# Altium PCB Mainboard.PcbDoc (part 2 of 2)
Units mm, origin at the board's own origin, x right, y up, seen from the top; angles counter-clockwise.
Board outline 80 x 116 mm, 4 copper layers (Top Layer, GND, VCC, Bottom Layer), stack 1.042 mm thick; 135 components, 105 nets, 477 pads, 1100 vias.
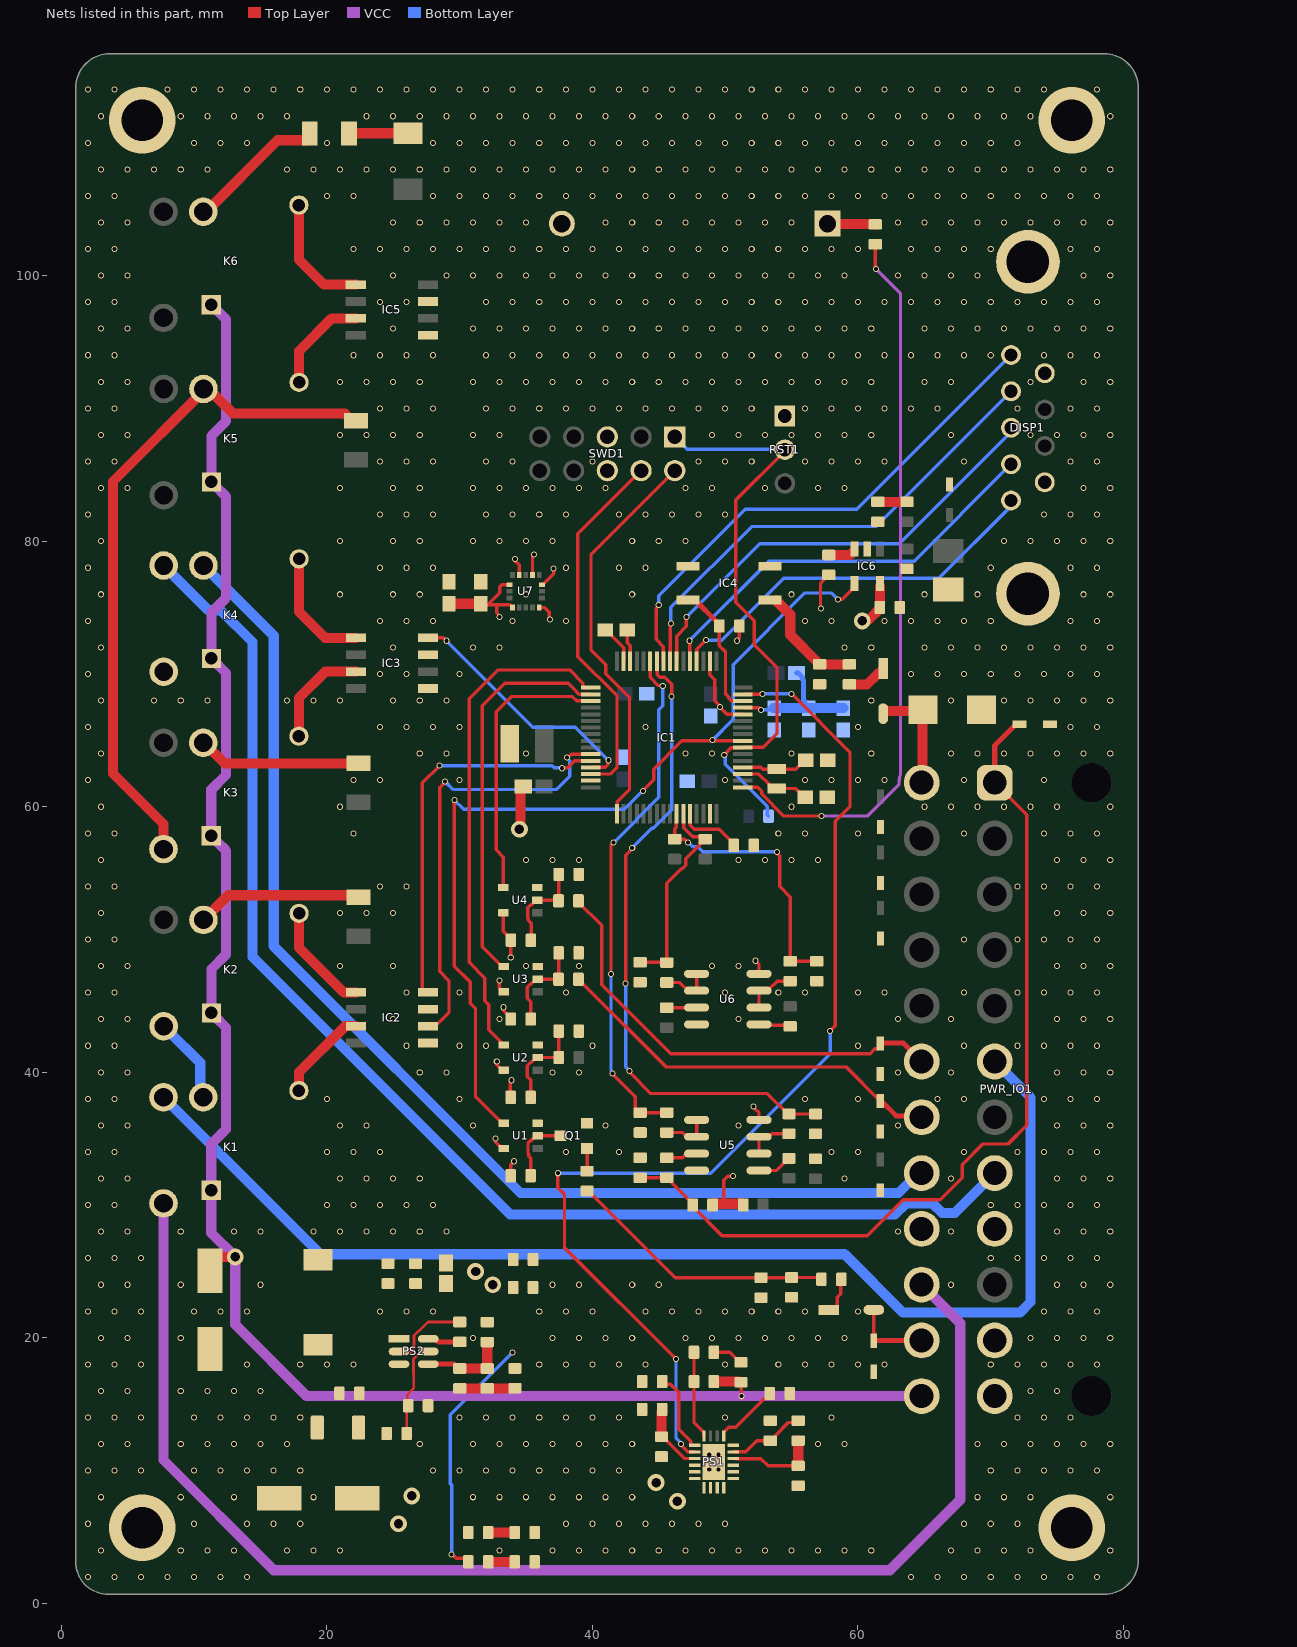
[diagram p4: the nets of this part, all layers, seen from the top]

## Via types
v1: diameter 0.457/0.457/0.457/0.457 (per signal layer), hole 0.305, Top Layer to Bottom Layer, tented both sides, 996 vias
v2: diameter 0.457, hole 0.305, Top Layer to Bottom Layer, tented both sides, 84 vias
v3: diameter 1.27, hole 0.711, Top Layer to Bottom Layer, tented both sides, 16 vias
v4: diameter 5, hole 3.1, Top Layer to Bottom Layer, 4 vias

## Nets (pads, with @x,y where several pads share a name; then routed paths per layer and width w, separated by ;. In a path a pad name is that pad's centre, name@x,y a point inside that pad or via, vN(x,y) a via of type N, cw(c..) or ccw(c..) an arc to the next point about the centre after c; other vN are vias at no path point) (continued)
LIGHT_SEL_IN_AUTOMODE: IC1.44 IC2.4 | length 29.1
  Top Layer w0.254: IC2.4@27.613,46.017 27.398,46.017 27.2,46.215 27.2,61.8 v2(28.5,63.1) ; v2(37.7,62.9) 37.739,62.939 38.129,62.939 38.652,63.462 39.339,63.462 IC1.44@39.349,63.452
  Bottom Layer w0.254: v2(28.5,63.1) 36.963,63.1 37.125,62.939 37.661,62.939 v2(37.7,62.9)
LIGHT_SWITCH: K1.3 PWR_IO1.6 | length 91.4
  Bottom Layer w0.762: K1.3@7.7,37.8 8.025,37.8 19.525,26.3 59,26.3 63.4,21.9 72.2,21.9 73,22.7 73,38.113 PWR_IO1.6@70.3,40.812
LIGHTS_MODE: IC1.43 IC2.2 | length 33.2
  Top Layer w0.254: IC2.2@27.613,43.477 27.811,43.675 IC2.2@28.375,43.675 ; 28.4,43.7 29.2,44.5 29.2,46.9 28.5,47.6 28.5,61.445 28.9,61.845 v2(28.9,61.9) ; v2(38.1,63.7) 38.155,63.7 38.417,63.962 IC1.43@39.862,63.962
  Bottom Layer w0.254: v2(28.9,61.9) 29.5,61.3 37.3,61.3 38.3,62.3 38.3,63.45 38.1,63.65 v2(38.1,63.7)
MENU_BUTTON: D7.1 PWR_IO1.18 R17.2 | length 34.4
  Top Layer w0.254: R17.2@38.95,52.912 38.95,52.812 40.7,51.062 40.7,46.6 45.9,41.4 60.913,41.4 61.277,41.764 61.527,41.764 61.675,41.912 D7.1@61.675,42.162
  Top Layer w0.381: D7.1@61.6,42.2 63.413,42.2 PWR_IO1.18@64.8,40.812
NetC1_1: C1.1 L1.1 PS2.2 | length 6.1
  Top Layer w0.2: PS2.2@25.438,18.974 26.374,18.974 26.561,19.161 26.561,20.167 26.905,20.51 26.934,20.51 27.62,21.196 C1.1@30.016,21.196
NetC1_2: C1.2 PS2.6 | length 2.5
  Top Layer w0.381: PS2.6@27.639,19.924 28.182,19.924 28.41,19.696 C1.2@30.016,19.696
NetC9_1: C9.1 PS2.4 R4.1 R5.1 | length 6.5
  Top Layer w0.381: PS2.4@27.639,18.024 29.585,18.024 29.913,17.696 C9.1@30.013,17.696
  Top Layer w0.762: C9.1@30.013,17.696 R4.1@31.968,17.696 ; R4.1@32.084,17.696 R5.1@32.084,19.683
NetC9_2: C9.2 R2.1 R4.2 | length 4.2
  Top Layer w0.762: C9.2@30.013,16.196 R2.1@34.17,16.196
NetC17_1: C17.1 IC1.27 R33.1 | length 39.1
  Top Layer w0.254: v2(41.4,47.4) 41.4,57.1 v2(41.6,57.3) ; v2(41.5,39.9) 43.227,38.173 43.227,37.236 43.5,36.963 C17.1@43.6,36.963 ; C17.1@43.662,36.962 R33.1@45.601,36.962 ; IC1.27@44.35,70.95 44.35,69.75 44.973,69.127 45.273,69.127 v2(45.3,69.1)
  Bottom Layer w0.254: v2(41.4,47.4) 41.4,40.144 41.461,40.082 41.461,39.939 v2(41.5,39.9) ; v2(41.6,57.3) 45,60.7 45,67.3 45.3,67.6 v2(45.3,69.1)
NetC18_1: C18.1 IC1.59 R34.1 R37.2 | length 15
  Top Layer w0.254: C18.1@43.7,48.3 43.724,48.276 45.587,48.276 R34.1@45.601,48.262 45.601,54.226 46.71,55.335 46.777,55.335 47.027,55.585 47.027,56.089 48.127,57.189 48.127,57.289 48.4,57.562 R37.2@48.5,57.562 ; IC1.59@46.855,58.99 46.873,58.971 46.873,58.427 47.562,57.738 48.324,57.738 R37.2@48.462,57.6
NetC20_1: C20.1 IC1.26 R35.1 | length 48.4
  Top Layer w0.254: v2(42.5,46.7) 42.5,56.345 43,56.845 v2(43,56.9) ; v2@42.8,40 44.4,38.4 53.163,38.4 54.701,36.862 R35.1@54.801,36.862 56.638,36.862 C20.1@56.7,36.8 ; IC1.26@44.85,70.95 44.873,70.927 44.873,69.927 45.062,69.738 45.452,69.738 45.965,69.225 v2(45.963,68.3) v2(45.963,68.3)
  Bottom Layer w0.254: v2(42.5,46.7) 42.5,40.4 v2(42.8,40.1) ; v2(43,56.9) 44.471,58.371 44.571,58.371 45.963,59.763 v2(45.963,68.3)
NetC21_1: C21.1 C22.1 C23.1 FB3.2 IC1.13 | length 10.2
  Top Layer w0.254: IC1.13@51.338,67.462 52.538,67.462 v2@52.6,67.4
  Bottom Layer w0.254: v2(52.7,67.3) C23.1@53.5,67.3
  Bottom Layer w0.381: FB3.2@55.376,70.073 55.5,70.073 55.839,69.734 55.839,69.573 55.9,69.511 55.9,68.042 55.985,67.957 55.985,67.818 56.2,67.603 C22.1@56.2,67.6
  Bottom Layer w0.762: C23.1@53.63,67.43 56.2,67.43 C21.1@58.9,67.43
NetC29_1: C29.1 IC1.58 R36.1 R38.2 | length 20
  Top Layer w0.254: IC1.58@46.356,58.95 46.327,58.921 46.327,58.47 46.2,58.343 R38.2@46.2,57.562 46.938,57.562 v2(47.2,57.3) ; v2(53.9,56.6) 53.939,56.561 53.939,56.461 54.1,56.3 54.1,54 54.901,53.199 R36.1@54.901,48.362 ; R36.1@54.901,48.362 56.662,48.362 C29.1@56.7,48.4
  Bottom Layer w0.254: v2(47.2,57.3) 47.255,57.3 47.576,56.979 47.921,56.979 48.3,56.6 v2(53.9,56.6)
NetC30_1: C30.1 R8.2 R10.1 U2.2 | length 7
  Top Layer w0.254: R8.2@35.35,38.112 35.35,39.428 35.1,39.678 35.1,40.495 35.369,40.764 35.403,40.764 35.739,41.1 U2.2@35.8,41.1 ; U2.2@35.876,41.112 37.388,41.112 R10.1@37.4,41.1 ; R10.1@37.466,41.112 37.472,41.118 37.472,43.072 C30.1@37.5,43.1
NetC31_1: C31.1 R7.1 R9.2 R11.1 | length 20.5
  Top Layer w0.254: R9.2@39.6,31.2 39.6,31.163 46.228,24.535 C31.1@52.7,24.535 ; C31.1@52.759,24.541 54.995,24.541 R11.1@55,24.547 ; R11.1@54.953,24.547 57.115,24.547 R7.1@57.25,24.412
NetC32_1: C32.1 R12.2 R13.1 U3.2 | length 7
  Top Layer w0.254: R12.2@35.35,44.012 35.35,45.328 35.1,45.578 35.1,46.395 35.369,46.664 35.403,46.664 35.739,47 U3.2@35.876,47 ; U3.2@35.876,47.012 37.388,47.012 R13.1@37.4,47 ; R13.1@37.45,47.012 37.456,47.018 37.456,48.856 C32.1@37.5,48.9
NetC33_1: C33.1 IC4.1 R15.1 | length 8.4
  Top Layer w0.762: IC4.1@53.845,75.516 54.9,74.461 54.9,72.95 56.996,70.854 56.996,70.754 57.015,70.735 C33.1@57.115,70.735 ; C33.1@57.177,70.723 R15.1@59.351,70.723
NetC34_1: C34.1 R16.2 R17.1 U4.2 | length 7.4
  Top Layer w0.254: R16.2@35.366,49.943 35.4,49.977 35.4,51.23 35.171,51.46 35.171,51.583 35.123,51.631 35.123,52.394 35.344,52.614 35.429,52.614 35.577,52.763 35.577,52.814 35.663,52.9 U4.2@35.9,52.9 ; U4.2@35.85,52.962 37.362,52.962 R17.1@37.4,53 ; C34.1@37.3,55.1 37.456,54.944 37.456,52.918 R17.1@37.45,52.912
NetC37_2: C37.2 IC1.30 | length 1.9
  Top Layer w0.254: C37.2@42.627,73.312 42.627,72.347 42.85,72.124 42.85,71.546 IC1.30@42.869,71.527
NetD1_1: D1.1 R7.2 | length 2.8
  Top Layer w0.254: D1.1@57.8,22.113 58.207,22.113 58.452,22.357 58.452,23.074 58.7,23.322 R7.2@58.7,24.3
NetD2_2: D2.2 F2.1 | length 4.5
  Top Layer w0.762: F2.1@21.6,110.7 21.617,110.717 26.096,110.717 D2.2@26.101,110.722
NetD6_1: D6.1 R15.2 | length 3.3
  Top Layer w0.762: R15.2@59.3,69.2 60.688,69.2 61.503,70.015 61.891,70.015 61.9,70.024 D6.1@61.9,70.412
NetD9_A: D9.A R18.1 | length 2.4
  Top Layer w0.254: D9.A@49.15,18.912 50.351,18.912 51.1,18.163 R18.1@51.2,18.163
NetD9_K: D9.K PS1.20 R22.1 | length 6.6
  Top Layer w0.254: D9.K@47.65,18.912 R22.1@47.65,16.713 47.65,13.658 48.4,12.908 PS1.20@48.4,12.612
NetD15_A: D15.A R42.1 | length 1.9
  Top Layer w0.762: R42.1@32.15,3.135 33.965,3.135 D15.A@34,3.1
NetD16_A: D16.A R45.1 | length 2
  Top Layer w0.762: R45.1@32.15,5.335 34.035,5.335 D16.A@34.1,5.4
NetD17_A: D17.A R43.1 | length 2.3
  Top Layer w0.762: D17.A@61.5,82.962 63.762,82.962 R43.1@63.8,83
NetF1_2: F1.2 K2.5 | length 12.3
  Top Layer w0.762: K2.5@11,51.6 11,51.763 12.571,53.334 22.248,53.334 F1.2@22.4,53.182
NetF2_2: F2.2 K6.5 | length 10.7
  Top Layer w0.762: K6.5@10.7,104.812 10.912,104.812 16.293,110.193 18.526,110.193 18.73,110.397 F2.2@18.73,110.712
NetF3_1: F3.1 K3.4 K5.5 | length 51.6
  Top Layer w0.762: K3.4@7.7,56.812 7.7,58.7 3.9,62.5 3.9,84.5 K5.5@11,91.6 ; K5.5@10.8,91.3 11.248,91.3 12.947,89.601 21.366,89.601 21.885,89.082 F3.1@22.2,89.082
NetF4_1: F4.1 K3.5 | length 12.3
  Top Layer w0.762: K3.5@10.9,64.9 10.9,64.661 12.293,63.268 F4.1@22.4,63.268
NetIC1_1: IC1.1 R39.2 | length 55.1
  Top Layer w0.254: IC1.1@51.338,61.462 52.438,61.462 52.745,61.155 52.745,60.98 54.425,59.3 v2(57.255,59.3) ; v2@61.301,100.601 R39.2@61.301,102.362
  VCC w0.254: v2(57.255,59.3) 60.7,59.3 63.02,61.62 63.095,61.695 63.095,61.812 cw(c64.8,61.812) 63.16,62.278 63.2,62.42 63.2,98.656 63.126,98.73 v2(61.344,100.511)
NetIC1_8: IC1.8 IC6.4 U1.4 | length 68.7
  Top Layer w0.254: v2(29.6,60.5) 29.6,48 30.8,46.8 30.8,45.2 31.2,44.8 31.2,38.162 33.2,36.162 U1.4@33.325,36.162 ; v2(43.8,61.2) 44.615,62.015 44.615,62.831 46.747,64.962 49.046,64.962 50.994,64.962 IC1.8@51.011,64.979 ; v2(58.5,75.6) 58.521,75.621 58.833,75.621 59.577,76.365 59.577,76.677 IC6.4@59.6,76.7
  Bottom Layer w0.254: v2(29.6,60.5) 30.3,59.8 42.4,59.8 v2(43.8,61.2) ; v2(49.046,65.022) 50.6,66.576 50.6,70.7 56,76.1 58,76.1 v2(58.5,75.6)
NetIC1_14: IC1.14 IC4.4 R14.2 | length 10.1
  Top Layer w0.254: R14.2@49.566,73.612 49.566,73.6 49.566,72.134 50.025,71.675 50.025,68.492 50.274,68.244 50.274,68.177 50.465,67.985 51.315,67.985 IC1.14@51.338,67.962
  Top Layer w0.381: IC4.4@47.187,75.572 47.725,75.572 49.356,73.941 49.356,73.744 R14.2@49.5,73.6
NetIC1_15: IC1.15 PS1.2 | length 82.6
  Top Layer w0.254: v2(37.4,32.4) 37.4,31.3 37.9,30.8 37.9,26.8 v2(46.3,18.4) ; v2@46.7,11.9 47.186,11.414 47.698,11.414 PS1.2@47.7,11.412 ; IC1.15@51.338,68.462 52.562,68.462 v2@52.6,68.5 ; v2(55,68.5) 59.4,64.1 59.4,60 58.3,58.9 58.3,43.5 v2@58,43.2
  Bottom Layer w0.254: v2(37.4,32.4) 48.9,32.4 57.9,41.4 v2(57.9,43.1) ; v2(46.3,18.4) 46.3,12.439 46.69,12.05 v2(46.69,11.995) ; v2(52.8,68.5) v2(55,68.5)
NetIC1_33: IC1.33 U2.4 | length 37.9
  Top Layer w0.254: U2.4@33.326,42.062 32.2,43.188 32.2,45.1 31.9,45.4 31.9,47.1 30.717,48.283 30.717,68.117 32.9,70.3 38.3,70.3 39.291,69.309 39.291,68.985 39.314,68.962 IC1.33@39.862,68.962
NetIC1_34: IC1.34 U3.4 | length 29.6
  Top Layer w0.254: U3.4@33.326,47.962 33.201,47.962 31.7,49.463 31.7,67.6 33.4,69.3 38.2,69.3 38.798,68.702 38.798,68.677 38.989,68.485 39.839,68.485 IC1.34@39.862,68.462
NetIC1_35: IC1.35 U4.4 | length 21.2
  Top Layer w0.254: 33.3,54.9 33.3,56.2 32.749,56.751 32.749,67.149 33.9,68.3 38.5,68.3 38.815,67.985 39.839,67.985 IC1.35@39.862,67.962 ; U4.4@33.3,53.912 33.3,54.9
NetIC1_60: IC1.60 R40.2 | length 4.9
  Top Layer w0.254: IC1.60@47.35,59.474 47.373,59.451 47.373,58.601 47.675,58.3 49.542,58.3 50.6,57.242 R40.2@50.6,57
NetIC2_5: IC2.5 K2.2 | length 8.2
  Top Layer w0.762: K2.2@18,51.9 17.911,51.811 17.911,49.389 21.283,46.017 IC2.5@22.189,46.017
NetIC2_7: IC2.7 K1.2 | length 7.1
  Top Layer w0.762: K1.2@17.9,38.6 17.9,40 21.377,43.477 IC2.7@22.189,43.477
NetIC3_5: IC3.5 K4.2 | length 9.1
  Top Layer w0.762: K4.2@17.9,78.7 17.91,78.69 17.91,74.69 19.6,73 19.883,72.717 IC3.5@22.189,72.717
NetIC3_7: IC3.7 K3.2 | length 7.9
  Top Layer w0.762: K3.2@17.9,65.4 17.9,68.2 19.877,70.177 IC3.7@22.189,70.177
NetIC5_5: IC5.5 K6.2 | length 9.1
  Top Layer w0.762: K6.2@17.9,105.2 17.9,101.2 19.5,99.6 19.783,99.317 IC5.5@22.188,99.317
NetIC5_7: IC5.7 K5.2 | length 7.7
  Top Layer w0.762: K5.2@18,91.9 17.91,91.99 17.91,94.31 20.377,96.777 IC5.7@22.188,96.777
NetIC6_3: IC6.3 R27.1 | length 2
  Top Layer w0.762: R27.1@57.801,78.962 59.413,78.962 IC6.3@59.669,79.219
NetK1_5: K1.5 K2.4 | length 6.3
  Bottom Layer w0.762: K2.4@7.8,43.1 8.084,43.1 10.467,40.718 10.467,38.358 K1.5@10.7,38.124
NetPS1_1: PS1.1 R25.2 | length 6.2
  Top Layer w0.254: R25.2@45.25,16.713 45.445,16.518 45.882,16.518 46.501,15.899 46.501,13.112 47.409,12.204 47.409,11.914 47.411,11.912 PS1.1@47.7,11.912
NetPS1_3: PS1.3 R23.1 R24.2 | length 5.2
  Top Layer w0.254: R23.1@45.301,12.562 46.949,10.914 47.698,10.914 PS1.3@47.7,10.912
  Top Layer w0.762: R23.1@45.201,12.562 45.201,14.463 45.25,14.513 R24.2@45.25,14.613
NetPS1_14: PS1.14 R19.1 R20.2 | length 6.8
  Top Layer w0.254: PS1.14@50.8,10.9 52.695,10.9 53.232,10.363 R19.1@55.5,10.363
  Top Layer w0.762: R19.1@55.501,10.363 R20.2@55.501,12.262
NetPS1_15: PS1.15 R20.1 R21.2 | length 5.9
  Top Layer w0.254: PS1.15@50.6,11.412 51.537,11.412 52.387,12.263 53.5,12.263 53.773,12.536 53.773,12.636 54.769,13.631 55.369,13.631 R20.1@55.501,13.762
NetPS1_17: PS1.17 R44.1 | length 4.7
  Top Layer w0.254: PS1.17@49.902,12.91 50.265,13.272 50.81,13.272 52.977,15.44 53.077,15.44 53.35,15.713 R44.1@53.35,15.813
NetPS2_5: PS2.5 R1.1 R3.2 | length 7.2
  Top Layer w0.2: R1.1@26.009,12.796 26.009,14.783 R3.2@26.122,14.896 26.066,14.952 26.066,15.722 26.544,16.2 26.544,17.253 26.526,17.27 26.526,18.409 27.091,18.974 PS2.5@27.639,18.974
NetQ1_1: Q1.1 R9.1 | length 1.7
  Top Layer w0.254: R9.1@39.6,32.6 Q1.1@39.601,34.262
NetQ1_3: Q1.3 R6.2 U1.2 | length 5.1
  Top Layer w0.254: R6.2@35.35,32.212 35.35,33.527 35.2,33.677 35.2,33.829 35.148,33.881 35.148,34.644 35.369,34.864 35.402,34.864 35.738,35.2 U1.2@35.9,35.2 ; U1.2@35.875,35.212 37.488,35.212 Q1.3@37.5,35.2
NetR29_1: R29.1 U5.3 | length 1.9
  Top Layer w0.254: R29.1@45.601,33.562 46.791,33.562 47.04,33.811 47.389,33.811 U5.3@47.4,33.8
NetR30_1: R30.1 U5.5 | length 2.5
  Top Layer w0.254: U5.5@52.55,32.607 53.881,32.607 54.427,33.154 54.427,33.239 54.588,33.4 R30.1@54.7,33.4
NetR31_1: R31.1 U6.3 | length 2.1
  Top Layer w0.254: R31.1@45.8,44.8 45.87,44.87 47.843,44.87 U6.3@47.85,44.877
NetR32_1: R32.1 U6.5 | length 2.3
  Top Layer w0.254: U6.5@52.55,43.607 52.616,43.541 54.659,43.541 R32.1@54.8,43.4
NetR33_2: R33.2 U5.1 U5.2 | length 3.5
  Top Layer w0.254: R33.2@45.601,35.462 46.791,35.462 47.053,35.2 U5.2@47.6,35.2 ; U5.2@47.85,35.147 47.85,36.257 47.893,36.3 U5.1@48.1,36.3
NetR34_2: R34.2 U6.1 U6.2 | length 3.4
  Top Layer w0.254: R34.2@45.601,46.762 46.585,46.762 47.247,46.1 U6.2@47.5,46.1 ; U6.2@47.8,46.2 47.85,46.25 U6.1@47.85,47.417
NetR35_2: R35.2 U5.6 U5.7 | length 3.2
  Top Layer w0.254: U5.7@52.55,35.147 52.55,34.037 52.587,34 U5.6@52.6,34 ; U5.7@52.9,35.1 53.246,35.1 53.509,35.362 R35.2@54.801,35.362
NetR36_2: R36.2 U6.6 U6.7 | length 3.7
  Top Layer w0.254: U6.7@52.55,46.147 52.55,44.95 U6.6@52.6,44.9 ; U6.7@52.7,46.2 53.253,46.2 53.915,46.862 R36.2@54.901,46.862
NRST: IC1.7 R41.2 RST1.2 SWD1.1 | length 43
  Top Layer w0.254: v2@50,64 50.439,64.439 51.315,64.439 IC1.7@51.338,64.462 51.361,64.485 52.885,64.485 53.9,65.5 53.9,70.5 52.2,72.2 52.2,74 50.8,75.4 50.8,83.1 RST1.2@54.4,86.7
  Bottom Layer w0.254: SWD1.1@46.205,87.852 47.145,86.912 RST1.2@54.5,86.912 ; v2@50,63.8 50,63.2 53.18,60.02 53.18,59.373 R41.2@53.265,59.288
  other v2: 49.933,63.912
OK_BUTTON: D5.1 PWR_IO1.19 R13.2 | length 30.1
  Top Layer w0.254: R13.2@38.95,47.012 38.95,46.912 39.223,46.639 39.323,46.639 45.562,40.4 59.11,40.4 D5.1@61.675,37.835
  Top Layer w0.381: D5.1@61.8,37.8 62.879,36.721 64.691,36.721 PWR_IO1.19@64.8,36.612
OLED_CS: DISP1.1 IC1.20 | length 28.6
  Top Layer w0.254: IC1.20@47.85,70.95 47.873,70.973 47.873,71.873 v2@48.5,72.5
  Bottom Layer w0.254: v2(48.561,72.547) 49.747,72.547 54.4,77.2 66.1,77.2 DISP1.1@71.3,82.4
OLED_DC: DISP1.4 IC1.24 | length 36
  Top Layer w0.254: IC1.24@45.85,70.95 45.873,70.973 45.873,73.764 v2(45.909,73.8)
  Bottom Layer w0.254: v2(45.909,73.8) 45.909,75.009 52,81.1 61.348,81.1 71.123,90.875 71.125,90.875 DISP1.4@71.2,90.8
OLED_MOSI: DISP1.3 IC1.23 | length 33.4
  Top Layer w0.254: IC1.23@46.35,70.95 46.35,72.85 47.079,73.579 47.079,74.279 v2(47.1,74.3)
  Bottom Layer w0.254: v2(47.1,74.3) 52.6,79.8 63.1,79.8 DISP1.3@71.2,87.9
OLED_RST: DISP1.5 IC1.25 | length 38.9
  Top Layer w0.254: v2(45,75.2) 45,75.15 44.8,74.95 44.8,72.6 45.35,72.05 IC1.25@45.35,70.95
  Bottom Layer w0.254: v2(45,75.2) 45,75.9 51.5,82.4 59.908,82.4 71.208,93.7 DISP1.5@71.3,93.7
OLED_SCK: DISP1.2 IC1.21 | length 31.1
  Top Layer w0.254: v2(47.3,72.5) 47.327,72.473 47.327,70.973 IC1.21@47.35,70.95
  Bottom Layer w0.254: v2(47.3,72.5) 53.3,78.5 64.228,78.5 71.328,85.6 DISP1.2@71.4,85.6
pV_reg: C5.2 C6.2 FB1.1 L1.2
RPM: D6.2 D8.2 PWR_IO1.13 | length 8.4
  Top Layer w0.762: D6.2@62,67.2 64.788,67.2 D8.2@64.9,67.312 ; PWR_IO1.13@64.8,61.812 64.85,61.862 64.85,67.15 D8.2@64.9,67.2
RTC_BAT: BT1.1 R39.1 | length 3.5
  Top Layer w0.762: BT1.1@57.9,103.7 58.081,103.881 61.282,103.881 R39.1@61.301,103.862
RTC_X1: C35.2 IC1.3 Y1.1 | length 4.9
  Top Layer w0.254: IC1.3@51.911,62.462 52.538,62.462 53.315,61.685 53.315,61.623 53.563,61.375 55.285,61.375 55.9,60.76 C35.2@55.9,60.6
RTC_X2: C36.2 IC1.4 Y1.2 | length 4.3
  Top Layer w0.254: IC1.4@51.935,62.962 52.68,62.962 52.817,62.825 55.31,62.825 55.885,63.4 C36.2@55.9,63.4
STAND_ONOFF: IC1.45 IC3.4 | length 19.1
  Top Layer w0.254: IC3.4@27.613,72.717 28.783,72.717 v2(29,72.5) ; IC1.45@39.862,62.962 39.885,62.985 40.985,62.985 41.173,63.173 41.173,63.473 v2(41.2,63.5)
  Bottom Layer w0.254: v2(29,72.5) 35.5,66 38.7,66 v2(41.2,63.5)
STARTER_RELAY: K4.5 PWR_IO1.20 | length 87.6
  Bottom Layer w0.762: K4.5@11,77.879 16,72.879 16,49.5 34.59,30.91 63.054,30.91 64.557,32.412 PWR_IO1.20@64.8,32.412
SWCLK: IC1.49 SWD1.2 | length 29.5
  Top Layer w0.254: IC1.49@41.85,60.032 41.871,60.053 41.871,60.371 42.8,61.3 42.8,68.2 41,70 41,70.7 39.9,71.8 39.9,79.007 SWD1.2@46.205,85.312
SWDIO: IC1.46 SWD1.4 | length 27.4
  Top Layer w0.254: IC1.46@39.862,62.462 41.362,62.462 41.859,62.959 41.859,68.341 38.9,71.3 38.9,80.547 43.353,85 SWD1.4@43.4,85
SWITCH_IN_STAND: K4.3 PWR_IO1.8 | length 98.3
  Bottom Layer w0.762: K4.3@8.1,78 8.1,77.779 11.077,74.801 11.999,74.801 14.4,72.4 14.4,48.7 33.809,29.291 62.796,29.291 63.648,30.143 65.6,30.143 66.343,29.4 67.288,29.4 PWR_IO1.8@70.3,32.412
TMP: C16.1 D10.1 PWR_IO1.1 R26.1 R29.2 | length 67
  Top Layer w0.254: C16.1@43.8,32 43.862,32.062 R29.2@45.601,32.062 ; R29.2@45.6,31.9 45.863,31.9 45.974,31.789 45.974,31.689 47.55,30.112 R26.1@47.55,30.012 47.55,29.912 49.762,27.7 60.7,27.7 63.4,30.4 66.2,30.4 67.85,32.05 67.85,33.05 69.4,34.6 71.3,34.6 72.7,36 72.7,59.413 70.4,61.713 PWR_IO1.1@70.4,61.9
  Top Layer w0.381: PWR_IO1.1@70.3,61.812 70.3,64.612 71.888,66.2 D10.1@72.1,66.2
VCC_bat_con: C15.1 K1.1 K2.1 K3.1 K4.1 K5.1 K6.1 PS1.9 PS1.10 PS1.11 PS1.12 PS1.13 PWR_IO1.24 R18.2 R19.2 R22.2 | length 141.8
  Top Layer w0.254: v2@51.2,15.6 R18.2@51.2,16.662
  Top Layer w0.762: C15.1@11.25,25.112 C15.1@11.2,25.062 11.2,25.556 11.744,26.1 v3(13.1,26.1) ; R22.2@49.15,16.713 51.05,16.713 51.1,16.663 R18.2@51.2,16.663
  VCC w0.762: K6.1@11.2,97.8 11.312,97.8 12.42,96.692 12.42,89.043 11.31,87.933 K5.1@11.31,84.462 ; K1.1@11.3,31.124 11.3,34.595 12.41,35.705 12.41,43.374 11.6,44.184 K2.1@11.6,44.5 ; K3.1@11.3,57.8 11.312,57.8 11.644,57.468 11.644,57.456 12.421,56.679 12.421,48.883 11.311,47.773 K2.1@11.311,44.474 ; K3.1@11.3,57.812 11.3,61.283 12.41,62.393 12.41,70.069 11.4,71.079 K4.1@11.4,71.2 ; K4.1@11.31,71.169 11.31,74.64 12.42,75.75 12.42,83.352 11.5,84.272 K5.1@11.5,84.4 ; K1.1@11.4,31.1 11.3,31 11.3,27.9 v3(13.1,26.1) 13.1,21 18.488,15.612 PWR_IO1.24@64.8,15.612
  other v2: 51.239,15.606
VCC_bat_k_con: D1.2 D3.1 PWR_IO1.23 | length 5.5
  Top Layer w0.254: D3.1@61.2,20.1 D1.2@61.201,22.113
  Top Layer w0.381: D3.1@61.3,19.8 64.788,19.8 PWR_IO1.23@64.8,19.812
VCC_bat_p: C2.1 C3.2 C4.2 PS1.4 PS1.5 PS1.6 PS1.7 PS1.8 PS2.3 R1.2 R23.2 R45.2
  other v3: 25.4,6 46.4,7.7 26.4,8.1 44.8,9.1
VCC_rect_con: K1.4 PWR_IO1.22 | length 102.2
  VCC w0.762: K1.4@7.7,30 7.7,10.8 16,2.5 62.4,2.5 67.7,7.8 67.7,21.113 PWR_IO1.22@64.8,24.012
VDD: C7.2 C8.2 C24.2 C27.1 C28.1 FB1.2 FB2.1 IC6.5 PWR_IO1.9 PWR_IO1.21 R2.2 R6.1 R8.1 R12.1 R14.1 R16.1 R26.2 R27.2 R28.2 R42.2 U1.5 U2.5 U3.5 U4.5 U5.8 U6.8 U7.1 U7.14 | length 54.2
  Top Layer w0.254: v2(29.4,3.7) 29.455,3.7 29.747,3.408 30.377,3.408 R42.2@30.65,3.135 ; C28.1@32,75.1 33.025,76.125 33.025,76.577 33.174,76.725 U7.14@33.763,76.725 ; 32.2,75.2 32.8,75.2 ; v2@32.7,34.9 32.7,34.762 33.2,34.262 U1.5@33.325,34.262 ; v2@32.8,40.7 32.8,40.563 33.201,40.162 U2.5@33.326,40.162 ; v2@33,46.8 33,46.388 33.053,46.335 33.053,46.21 33.201,46.062 U3.5@33.326,46.062 ; v2@33,74.4 32.8,74.6 32.8,75.2 ; v2@33.3,44.8 33.3,44.662 33.85,44.112 R12.1@33.85,44.012 ; U4.5@33.3,52.012 33.3,50.609 33.8,50.109 R16.1@33.8,50 ; R6.1@33.85,32.212 33.85,33.05 v2(34.1,33.3) ; R8.1@33.85,38.112 33.825,38.137 33.825,39.27 33.9,39.345 v2(33.9,39.4) ; v2(33.852,48.632) 33.859,48.639 33.859,49.936 R16.1@33.866,49.943 ; U7.1@33.988,75 33.988,75.05 33.94,75.098 33.89,75.098 33.788,75.2 32.8,75.2 ; 49.9,30.1 49.9,31.858 50.203,32.161 50.561,32.161 v2(50.6,32.2) ; v2(50.9,72.5) 50.9,72.555 51.066,72.721 R14.1@51.066,73.612 ; v2@52.2,37.3 52.55,36.95 U5.8@52.55,36.417 ; v2(52.3,48.4) 52.3,48.348 52.55,48.098 U6.8@52.55,47.417 ; v2@57.184,74.909 57.184,76.845 57.428,77.089 57.428,77.189 57.701,77.462 R27.2@57.801,77.462
  Top Layer w0.762: C27.1@29.2,75.285 31.515,75.285 C28.1@31.6,75.2 ; v3(34.5,58.3) 34.597,58.397 34.597,61.364 34.745,61.512 FB2.1@34.8,61.512 ; R26.2@49.05,30.012 49.05,30.081 49.069,30.1 49.9,30.1 51.331,30.1 R28.2@51.331,30 ; v3@60.5,74.1 60.838,74.1 61.65,74.912 C24.2@61.65,75.012 IC6.5@61.65,76.619
  VCC w0.762: PWR_IO1.9@69.888,28.212 PWR_IO1.9@69.9,28.2
  Bottom Layer w0.254: v2(29.4,3.7) 29.4,8.927 29.3,9.027 29.3,14.2 v2(34,18.9)
  other v2: 32.7,35 52.125,37.415 32.8,40.8 33.3,44.9 33,46.9 33,74.3 57.225,74.915
  other v3: 32.5,24 31.2,25 60.326,73.991
VSS: BT1.2 C2.2 C3.1 C4.1 C5.1 C6.1 C7.1 C8.1 C10.1 C11.2 C12.2 C13.2 C14.2 C15.2 C16.2 C17.2 C18.2 C19.2 C20.2 C21.2 C22.2 C23.2 C24.1 C25.1 C26.2 C27.2 C28.2 C29.2 C30.2 C31.2 C32.2 C33.2 C34.2 C35.1 C36.1 C37.1 D3.2 D4.2 D5.2 D7.2 D8.1 D10.2 D11.2 D12.2 D13.2 D14.2 D15.K D16.K D17.K DISP1.6 DISP1.9 DISP1.MH1 DISP1.MH2 IC1.12 IC1.18 IC1.31 IC1.47 IC1.63 IC2.1 IC2.3 IC3.1 IC3.3 IC4.2 IC4.3 IC5.1 IC5.3 IC6.2 K4.4 PS1.16 PS1.21 PS2.1 PWR_IO1.11 PWR_IO1.12 Q1.2 R3.1 R5.2 R11.2 R21.1 R24.1 R25.1 R40.1 R44.2 RST1.1 SWD1.5 SWD1.6 U1.3 U2.3 U3.3 U4.3 U5.4 U6.4 U7.5 U7.8 U7.10 U7.12 | length 13.9
  Top Layer w0.254: v2@34.2,78.5 34.488,78.212 U7.12@34.488,77.45 ; U7.10@35.488,77.45 35.488,78.833 35.6,78.945 v2(35.6,79) ; U7.5@35.988,75 36.4,75 36.761,74.639 36.761,74.139 v2(36.8,74.1) ; U7.8@36.213,76.725 36.263,76.725 37.1,77.562 v2@37.1,77.8 ; C37.1@41.4,73 41.425,72.975 41.425,72.907 42.35,71.982 IC1.31@42.35,70.95 ; IC1.18@48.85,70.95 48.85,69.935 49.214,69.572 49.214,67.976 49.6,67.59 49.6,67.5 50.138,66.962 IC1.12@51.338,66.962
  other v1: 2,2 4,2 6,2 8,2 10,2 12,2 14,2 64,2 66,2 68,2 70,2 72,2 74,2 76,2 78,2 3,4 9,4 11,4 13,4 17,4 19,4 21,4 33,4 37,4 39,4 41,4 43,4 45,4 47,4 49,4 51,4 53,4 55,4 57,4 59,4 61,4 67,4 69,4 71,4 73,4 79,4 2,6 10,6 14,6 16,6 18,6 38,6 40,6 42,6 44,6 46,6 48,6 50,6 68,6 70,6 72,6 3,8 9,8 13,8 19,8 31,8 33,8 35,8 37,8 39,8 41,8 43,8 69,8 71,8 73,8 79,8 2,10 4,10 6,10 10,10 12,10 14,10 16,10 18,10 28,10 30,10 32,10 34,10 36,10 38,10 40,10 42,10 70,10 72,10 74,10 76,10 78,10 3,12 5,12 9,12 11,12 13,12 15,12 17,12 27,12 31,12 33,12 35,12 37,12 39,12 41,12 43,12 57,12 59,12 69,12 71,12 73,12 75,12 77,12 79,12 2,14 4,14 6,14 10,14 12,14 14,14 16,14 18,14 30,14 32,14 34,14 36,14 38,14 40,14 42,14 50,14 58,14 72,14 74,14 76,14 3,16 5,16 9,16 11,16 13,16 15,16 73,16 75,16 2,18 4,18 6,18 14,18 18,18 20,18 22,18 36,18 38,18 40,18 42,18 44,18 50,18 54,18 56,18 58,18 60,18 62,18 70,18 72,18 74,18 76,18 78,18 3,20 5,20 9,20 31,20 37,20 39,20 41,20 43,20 47,20 49,20 51,20 53,20 55,20 57,20 59,20 73,20 75,20 77,20 79,20 2,22 4,22 6,22 10,22 12,22 14,22 24,22 26,22 28,22 36,22 38,22 40,22 44,22 46,22 48,22 50,22 52,22 54,22 56,22 60,22 74,22 76,22 78,22 3,24 5,24 9,24 15,24 37,24 39,24 43,24 45,24 67,24 75,24 77,24 79,24 2,26 4,26 6,26 70,26 72,26 74,26 76,26 78,26 3,28 5,28 9,28 13,28 15,28 19,28 21,28 23,28 25,28 27,28 29,28 63,28 67,28 75,28 77,28 79,28 2,30 4,30 20,30 22,30 24,30 26,30 28,30 70,30 72,30 74,30 76,30 78,30 3,32 5,32 21,32 23,32 25,32 27,32 59,32 67,32 75,32 77,32 79,32 2,34 4,34 20,34 22,34 24,34 38,34 42,34 58,34 60,34 68,34 72,34 74,34 76,34 78,34 3,36 5,36 21,36 23,36 31,36 41,36 51,36 63,36 75,36 77,36 79,36 2,38 4,38 20,38 30,38 56,38 60,38 66,38 68,38 74,38 76,38 78,38 3,40 5,40 27,40 29,40 37,40 39,40 63,40 67,40 75,40 77,40 79,40 2,42 4,42 26,42 30,42 32,42 40,42 60,42 68,42 72,42 74,42 76,42 78,42 3,44 5,44 25,44 33,44 51,44 63,44 67,44 75,44 77,44 79,44 2,46 4,46 26,46 30,46 38,46 50,46 54,46 56,46 60,46 62,46 68,46 72,46 74,46 76,46 78,46 3,48 5,48 21,48 25,48 35,48 39,48 49,48 51,48 75,48 77,48 79,48 2,50 4,50 68,50 72,50 74,50 76,50 78,50 3,52 21,52 23,52 25,52 75,52 77,52 79,52 2,54 4,54 24,54 26,54 72,54 74,54 76,54 78,54 3,56 35,56 37,56 39,56 51,56 53,56 55,56 57,56 75,56 77,56 79,56 2,58 4,58 22,58 54,58 56,58 60,58 68,58 74,58 76,58 78,58 3,60 21,60 55,60 65,60 67,60 69,60 71,60 73,60 75,60 79,60 2,62 22,62 24,62 30,62 50,62 56,62 58,62 60,62 62,62 68,62 74,62 3,64 27,64 29,64 35,64 47,64 49,64 55,64 61,64 67,64 69,64 71,64 73,64 75,64 77,64 79,64 2,66 24,66 26,66 28,66 30,66 44,66 60,66 76,66 78,66 3,68 7,68 9,68 11,68 17,68 19,68 21,68 25,68 27,68 29,68 61,68 67,68 71,68 73,68 75,68 77,68 79,68 2,70 24,70 26,70 30,70 64,70 66,70 68,70 70,70 72,70 74,70 76,70 78,70 3,72 25,72 31,72 33,72 59,72 61,72 65,72 67,72 69,72 71,72 73,72 75,72 77,72 79,72 2,74 24,74 26,74 28,74 34,74 38,74 56,74 58,74 62,74 64,74 66,74 68,74 70,74 76,74 78,74 3,76 21,76 25,76 27,76 35,76 43,76 55,76 65,76 69,76 77,76 79,76 2,78 24,78 26,78 28,78 38,78 42,78 44,78 70,78 76,78 78,78 3,80 21,80 25,80 27,80 31,80 33,80 35,80 37,80 43,80 45,80 47,80 71,80 73,80 75,80 77,80 79,80 2,82 24,82 26,82 28,82 32,82 34,82 36,82 38,82 42,82 44,82 46,82 48,82 50,82 74,82 76,82 78,82 3,84 5,84 21,84 25,84 27,84 31,84 33,84 35,84 37,84 39,84 41,84 47,84 49,84 53,84 57,84 59,84 77,84 79,84 2,86 4,86 24,86 26,86 28,86 32,86 34,86 40,86 48,86 50,86 52,86 56,86 58,86 60,86 62,86 68,86 76,86 78,86 3,88 5,88 21,88 23,88 25,88 27,88 31,88 33,88 49,88 51,88 53,88 55,88 57,88 59,88 61,88 67,88 73,88 75,88 77,88 79,88 2,90 4,90 24,90 26,90 28,90 32,90 34,90 36,90 38,90 40,90 42,90 44,90 46,90 48,90 50,90 52,90 56,90 58,90 60,90 62,90 64,90 66,90 72,90 76,90 78,90 3,92 5,92 21,92 23,92 25,92 27,92 31,92 33,92 35,92 37,92 39,92 41,92 43,92 45,92 47,92 49,92 51,92 53,92 55,92 57,92 59,92 61,92 65,92 67,92 73,92 77,92 79,92 2,94 4,94 22,94 24,94 26,94 28,94 32,94 34,94 36,94 38,94 40,94 42,94 44,94 46,94 48,94 50,94 52,94 54,94 56,94 58,94 60,94 62,94 64,94 66,94 68,94 70,94 74,94 76,94 78,94 3,96 5,96 25,96 31,96 33,96 35,96 37,96 39,96 41,96 43,96 45,96 47,96 49,96 51,96 53,96 55,96 57,96 59,96 61,96 65,96 67,96 69,96 71,96 73,96 75,96 77,96 79,96 2,98 4,98 24,98 26,98 32,98 34,98 36,98 38,98 40,98 42,98 44,98 46,98 48,98 50,98 52,98 54,98 56,98 58,98 60,98 62,98 64,98 66,98 68,98 70,98 72,98 74,98 76,98 78,98 3,100 5,100 25,100 29,100 31,100 33,100 35,100 37,100 39,100 41,100 43,100 45,100 47,100 49,100 51,100 53,100 55,100 57,100 59,100 63,100 65,100 67,100 69,100 77,100 79,100 2,102 4,102 22,102 24,102 26,102 28,102 30,102 32,102 34,102 36,102 38,102 40,102 42,102 44,102 46,102 48,102 50,102 52,102 54,102 56,102 58,102 60,102 64,102 66,102 68,102 70,102 76,102 78,102 3,104 5,104 25,104 27,104 29,104 31,104 33,104 35,104 41,104 43,104 45,104 47,104 49,104 51,104 53,104 55,104 63,104 65,104 67,104 69,104 71,104 73,104 75,104 77,104 79,104 2,106 4,106 20,106 22,106 28,106 30,106 32,106 34,106 36,106 38,106 40,106 42,106 44,106 46,106 48,106 50,106 52,106 54,106 56,106 58,106 60,106 62,106 64,106 66,106 68,106 70,106 72,106 74,106 76,106 78,106 3,108 5,108 7,108 9,108 11,108 17,108 19,108 21,108 23,108 25,108 27,108 29,108 31,108 33,108 35,108 37,108 39,108 41,108 43,108 45,108 47,108 49,108 51,108 53,108 55,108 57,108 59,108 61,108 63,108 65,108 67,108 69,108 71,108 73,108 75,108 77,108 79,108 2,110 10,110 12,110 14,110 20,110 28,110 30,110 32,110 34,110 36,110 38,110 40,110 42,110 44,110 46,110 48,110 50,110 52,110 54,110 56,110 58,110 60,110 62,110 64,110 66,110 68,110 70,110 72,110 3,112 9,112 11,112 13,112 15,112 17,112 23,112 25,112 27,112 29,112 31,112 33,112 35,112 37,112 39,112 41,112 43,112 45,112 47,112 49,112 51,112 53,112 55,112 57,112 59,112 61,112 63,112 65,112 67,112 69,112 71,112 73,112 79,112 2,114 4,114 8,114 10,114 12,114 14,114 16,114 18,114 20,114 22,114 24,114 26,114 28,114 30,114 32,114 34,114 36,114 38,114 40,114 42,114 44,114 46,114 48,114 50,114 52,114 54,114 56,114 58,114 60,114 62,114 64,114 66,114 68,114 70,114 72,114 74,114 78,114
  other v2: 48.8,10.1 49.5,10.1 48.8,11.2 49.5,11.2 49.616,67.519 37.061,77.947 34.161,78.647
  other v4: 6.095,5.698 76.097,5.704 6.1,111.703 76.104,111.704
pads on no net: IC1.2 IC1.5 IC1.6 IC1.9 IC1.16 IC1.17 IC1.22 IC1.28 IC1.36 IC1.37 IC1.38 IC1.39 IC1.50 IC1.51 IC1.52 IC1.53 IC1.54 IC1.55 IC1.56 IC1.57 IC1.61 IC1.62 IC2.6 IC2.8 IC3.6 IC3.8 IC5.6 IC5.8 K3.3 K5.3 K6.3 PS1.18 PS1.19 PWR_IO1.MH1 PWR_IO1.MH2 RST1.3 SWD1.3 SWD1.7 SWD1.8 SWD1.9 SWD1.10 U1.1 U2.1 U3.1 U4.1 U7.2 U7.3 U7.9 U7.11 U7.13 U7.15 U7.16

## Polygon pours and split planes (outlines as drawn)
VCC_bat_p on Top Layer "VCC_BAT_P_L01_P004" (solid, pour order 4): 28.2,6.6 28.8,6 31.1,6 31.3,5.8 31.3,4.6 31.1,4.4 22.2,4.4 19.8,6.8 19.8,11.2 21.7,13.1 21.7,16.9 23.2,18.4 26,18.4 26.2,18.2 26.2,16.4 25.4,15.6 25.4,11 28.2,8.2 28.2,7.9
VSS on Top Layer "VSS_L01_P013" (solid, pour order 13): 1.1,114.16 cw(c3.64,114.16) 3.64,116.7 78.56,116.7 cw(c78.56,114.16) 81.1,114.16 81.1,3.24 cw(c78.56,3.24) 78.56,0.7 3.64,0.7 cw(c3.64,3.24) 1.1,3.24 1.1,3.7
NetC1_1 on Top Layer "NETC1_1_L01_P007" (solid, pour order 7): 18.1,18.7 18.1,20.3 18.2,20.4 20.5,20.4 20.6,20.4 20.7,20.4 23.2,20.4 24.3,19.3 26.1,19.3 26.2,19.2 26.2,18.8 26.1,18.7
3V3_MPU on Top Layer "3V3_MPU_L01_P001" (solid, pour order 1): 35.7,66.3 37,66.3 37.1,66.2 37.1,62.5 38.4,61.2 38.4,60.1 38.8,59.7 39.8,59.7 40.1,59.4 40.1,57.3 39.6,56.8 36.2,56.8 35.7,57.3
VDD on Top Layer "VDD_L01_P002" (solid, pour order 2): 33.1,22.3 33.3,22.1 33.3,17.3 33.5,17.1 34.8,17.1 35,17.3 35,17.5 35,23 34.8,23.2 34.8,27.3 34.5,27.6 31.1,27.6 30.2,26.7 30.2,25.1 29.9,24.8 28.3,24.8 28.298,24.776 28.3,24.774 28.3,23.4 29.4,22.3
VCC_bat_p on Top Layer "VCC_BAT_P_L01_P005" (solid, pour order 5): 44.7,11.5 45.7,11.5 46.6,10.6 48.1,10.6 48.1,9.2 48.2,9.1 49.1,9.1 49.1,8.3 47.4,6.6 44.5,6.6 43.7,7.4 43.7,10.5
VCC_bat_con on Top Layer "VCC_BAT_CON_L01_P006" (solid, pour order 6): 63.2,17.7 66.8,17.7 67.6,16.9 67.6,10.2 62.3,4.9 52.1,4.9 49.3,7.7 49.3,9.2 50.1,9.2 50.1,10.5 52.8,10.5 53.7,9.6 58.5,9.6 59.9,11 59.9,14.4
pV_reg on Top Layer "PV_REG_L01_P009" (solid, pour order 9): 18.1,25.1 18.188,25 29.6,25 29.7,25.1 29.7,26.3 29.2,26.8 18.2,26.8 18.1,26.7
VDD on VCC "VDD_L03_P014" (solid, pour order 14): 28.2,22 45.5,22 49.8,26.3 71.8,26.3 72.7,27.2 72.7,29.3 71.8,30.2 62.1,30.2 61.5,30.8 61.5,31.1 61.5,72.3 62.7,73.5 62.7,77.6 61.3,79 53.7,79 29.4,79 26.2,75.8 26.2,24
3V3_MPU on VCC "3V3_MPU_L03_P008" (solid, pour order 8): 35.6,71.2 36.4,72 51.6,72 52.4,71.2 52.4,56.3 51.6,55.5 36.4,55.5 35.6,56.3
VCC_bat_p on VCC "VCC_BAT_P_L03_P003" (solid, pour order 3): 48.1,10.8 48.1,9.1 49.1,9.1 49.1,7 46.4,4.3 23,4.3 20.2,7.1 20.2,10.8 21,11.6 47.3,11.6
VSS on GND "VSS_L02_P000" (solid, pour order 0): 1.1,114.2 cw(c3.6,114.2) 3.6,116.7 78.56,116.7 cw(c78.56,114.16) 81.1,114.16 81.1,3.24 cw(c78.56,3.24) 78.56,0.7 3.64,0.7 cw(c3.64,3.24) 1.1,3.24 1.1,14.8
VSS on Bottom Layer "VSS_L04_P010" (solid, pour order 10): 1.1,114.16 cw(c3.64,114.16) 3.64,116.7 78.56,116.7 cw(c78.56,114.16) 81.1,114.16 81.1,3.24 cw(c78.56,3.24) 78.56,0.7 3.64,0.7 cw(c3.64,3.24) 1.1,3.24 1.1,5.5

## Other copper
Top Layer:
  pour cut-out: 6.4,106.9 19.2,106.9 19.2,95.1 6.4,95.1
  pour cut-out: 6.4,93.6 19.2,93.6 19.2,81.8 6.4,81.8
  pour cut-out: 6.4,80.3 19.2,80.3 19.2,68.5 6.4,68.5
  pour cut-out: 6.4,67 19.2,67 19.2,55.2 6.4,55.2
  pour cut-out: 6.4,53.6 19.2,53.6 19.2,41.8 6.4,41.8
  pour cut-out: 6.4,40.3 19.2,40.3 19.2,28.5 6.4,28.5
  pour cut-out: 15.743,24.94 23.043,24.94 23.043,20.54 15.743,20.54
GND:
  pour cut-out: 6.4,106.9 19.2,106.9 19.2,95.1 6.4,95.1
  pour cut-out: 6.4,93.6 19.2,93.6 19.2,81.8 6.4,81.8
  pour cut-out: 6.4,80.3 19.2,80.3 19.2,68.5 6.4,68.5
  pour cut-out: 6.4,67 19.2,67 19.2,55.2 6.4,55.2
  pour cut-out: 6.4,53.6 19.2,53.6 19.2,41.8 6.4,41.8
  pour cut-out: 6.4,40.3 19.2,40.3 19.2,28.5 6.4,28.5
  pour cut-out: 15.7,24.9 23,24.9 23,20.5 15.7,20.5

## Silkscreen, mask and mechanical layers (free items; w line width, h text height)
Top Overlay:
  circle w0.254: c45.7,103.9 r10.6
  circle w0.254: c76.1,111.7 r3.202
  circle w0.254: c6.1,111.7 r3.202
  circle w0.254: c6.1,5.7 r3.202
  circle w0.254: c76.1,5.7 r3.202
  lines w0.154: 33.2,1.7 49.7,1.7 49.7,6.8 33.2,6.8 33.2,1.7 ; 40.1,17.8 50.2,17.8 50.2,22.2 40.1,22.2 40.1,17.8 ; 52.7,85.6 56.3,85.6 56.3,91.2 52.7,91.2 52.7,85.6 ; 57,80.4 62.6,80.4 62.6,85.9 57,85.9 57,80.4
  text "Vdisp" at 57.554,84.399 h1
  text "Vbat fault" at 40.654,20.666 h1
  text "+12V bat OK" at 37.354,4.866 h1
  text "+3.3V reg OK" at 37.354,2.599 h1
Bottom Overlay:
  circle w0.254: c76.1,111.7 r3.202
  circle w0.254: c6.1,111.7 r3.202
  circle w0.254: c6.1,5.7 r3.202
  circle w0.254: c76.1,5.7 r3.202
  text "PCrs v3.0" at 71.191,6.3 h2
  text "by Maksymilian Mazur" at 71.191,3.1 h1.5

## Text inside footprints (layer, text, board x,y; h text height)
D9: Mechanical 13 "+" at 49.717,19.52 h0.5
D15: Mechanical 13 "+" at 33.584,2.527 h0.5 r180
D16: Mechanical 13 "+" at 33.584,4.727 h0.5 r180
D17: Mechanical 13 "+" at 60.892,83.529 h0.5 r90